# Altium PCB obc-comm.PcbDoc (part 2 of 2)
Units mm, origin at the board's own origin, x right, y up, seen from the top; angles counter-clockwise.
Board outline 60.02 x 35 mm, 4 copper layers (Top Layer, GND, VCC, Bottom Layer), stack 1.11 mm thick; 70 components, 62 nets, 294 pads, 175 vias.
Unrouted connection lines stored in the file: 79.
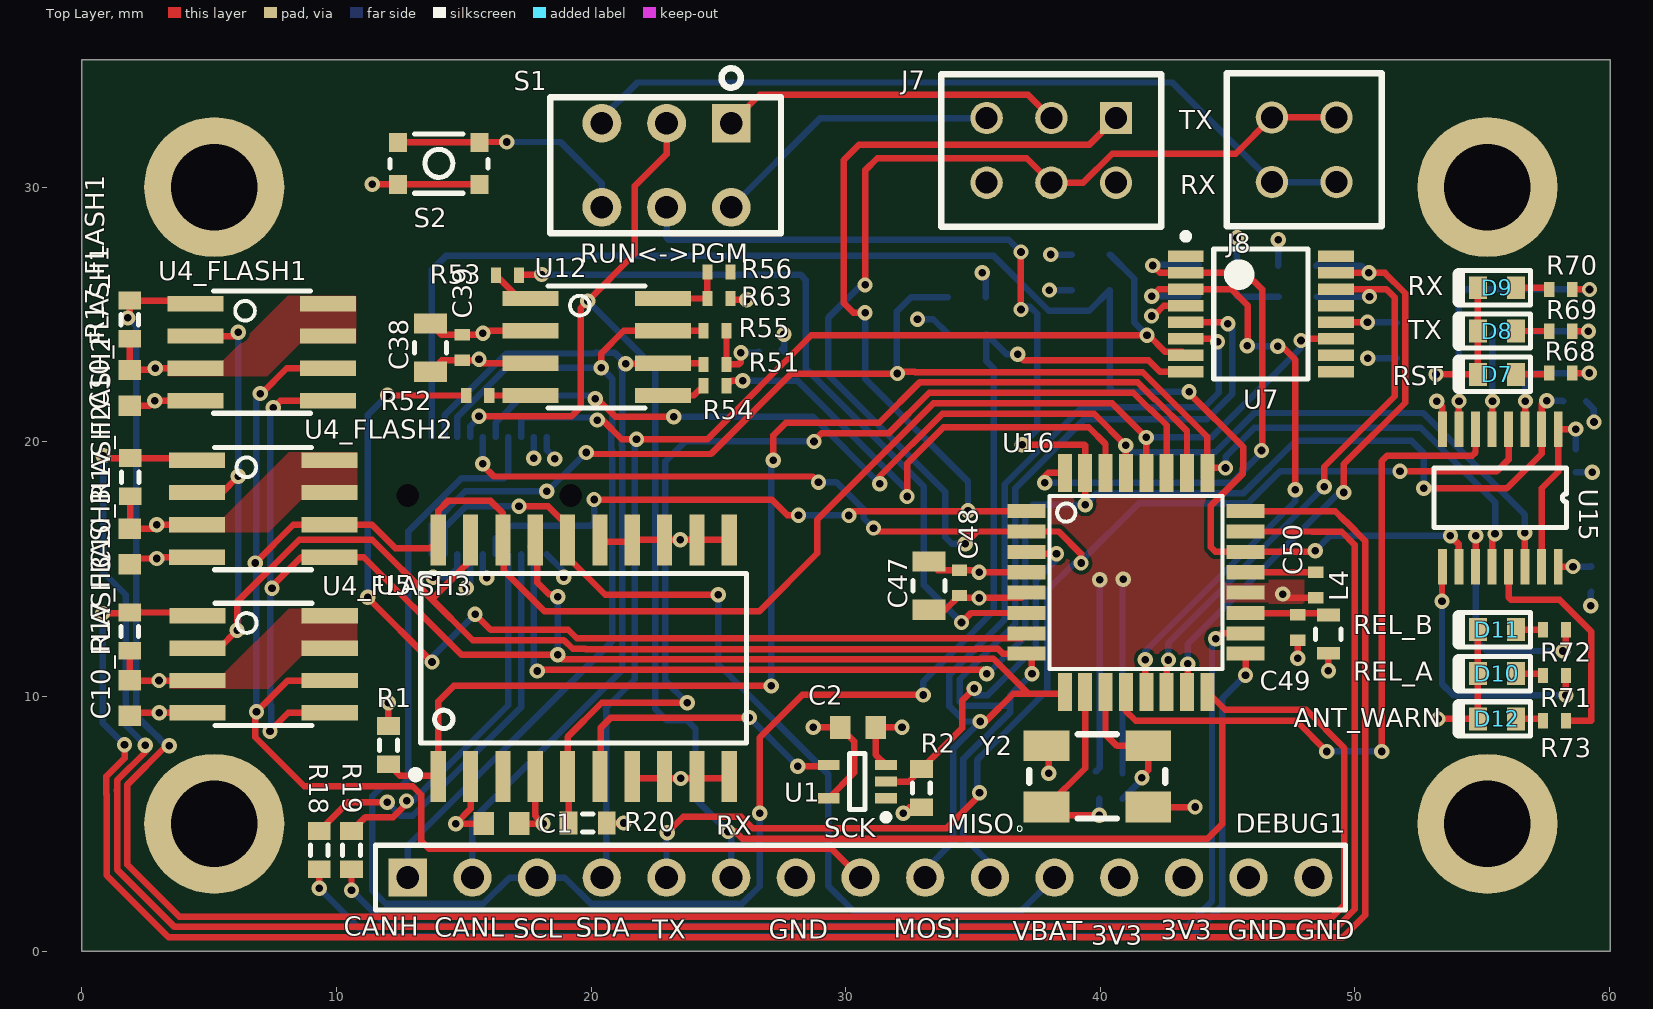
[diagram p0: Top Layer view]

## Via types
v1: diameter 0.6, hole 0.3, Top Layer to Bottom Layer, tented both sides, 165 vias
v2: diameter 0.6, hole 0.3, Top Layer to Bottom Layer, 10 vias

## Nets (pads, with @x,y where several pads share a name; then routed paths per layer and width w, separated by ;. In a path a pad name is that pad's centre, name@x,y a point inside that pad or via, vN(x,y) a via of type N, cw(c..) or ccw(c..) an arc to the next point about the centre after c; other vN are vias at no path point) (continued)
OUT4: (continued)
  Top Layer w0.254: v1(53.416,13.741) 53.416,15.084 U15.9 U15.9@53.467,15.065 ; v1(58.286,10.051) R71.2
  Bottom Layer w0.254: v1(53.416,13.741) 53.416,10.49 53.855,10.051 v1(58.286,10.051)
OUT5: R72.2 U15.11 | length 9.8
  Top Layer w0.254: U15.11 54.737,15.105 v1(54.737,16.307) ; v1(58.166,11.786) 58.286,11.906 R72.2
  Bottom Layer w0.254: v1(54.737,16.307) 54.737,12.228 55.179,11.786 v1(58.166,11.786)
OUT6: R73.2 U15.13 | length 9.5
  Top Layer w0.254: U15.13 56.032,13.894 56.134,13.792 58.039,13.792 59.284,12.548 59.284,9.042 R73.2
PAY: R19.2 U16.18 | length 47.2
  Top Layer w0.254: v1(10.59,2.386) R19.2 ; v1(44.526,12.268) 44.736,12.478 U16.18
  Bottom Layer w0.254: v1(10.59,2.386) 11.986,0.991 43.418,0.991 44.384,1.957 44.384,12.126 v1(44.526,12.268)
RESETn: R6.1 U7.3 U16.13 | length 25.4
  Top Layer w0.254: v1(41.763,11.442) 41.763,10.217 U16.13 ; v1(42.014,25.719) 42.289,25.994 U7.3 45.146,25.994 45.796,25.344 v1@45.796,23.774 ; v1(46.965,23.749) 47.133,23.749 47.65,23.231 v1(47.65,18.118)
  Bottom Layer w0.254: v1(41.763,11.442) 41.763,11.778 47.65,17.666 v1(47.65,18.118) ; v1(42.014,25.719) R6.1 ; v1(45.771,23.774) 45.72,23.774 45.695,23.749 v1(46.965,23.749)
RS: R56.1 R63.2 U12.8 | length 2.8
  Top Layer w0.254: U12.8 R63.2 R56.1
RS_IN: R56.2
RST_EPS: J1.6 R18.1 | length 16.4
  Top Layer w0.254: R18.1 10.451,5.842 v1(11.989,5.842)
  Bottom Layer w0.254: v1(11.989,5.842) 12.513,5.318 12.993,5.318 17.25,9.575 J1.6
RST_OBC: J1.4 R74.1 S1.5 U15.2 U16.31 | length 84.5
  Top Layer w0.254: v1(17.88,10.998) 17.931,11.049 35.382,11.049 v1(35.535,10.897) ; v1(36.881,27.457) 36.957,27.381 36.881,27.305 36.881,25.298 v1@36.982,25.197 ; v1(36.932,19.888) 39.377,19.888 39.402,19.863 U16.31 v1(39.402,17.533) ; v1(52.705,18.173) 55.968,18.173 57.332,19.537 U15.2 57.332,21.499 57.449,21.615 v1(57.531,21.615)
  Bottom Layer w0.254: J1.4 17.75,11.128 v1(17.88,10.998) ; S1.5 22.962,28.016 23.038,27.94 36.398,27.94 v1(36.881,27.457) ; v1(35.535,10.897) 35.56,10.871 37.059,12.37 37.059,17.247 37.345,17.533 v1(39.402,17.533) 39.857,17.988 45.623,17.988 47.676,20.041 52.222,20.041 52.705,19.558 v1(52.705,18.173) ; v1(36.932,19.888) 37.516,20.472 37.516,25.028 37.246,25.298 36.982,25.298 v1@36.982,25.197 ; v1(57.531,21.615) 58.148,21.615 R74.1
  other v1: 36.881,25.197
RST_PAY: J1.8 R19.1 | length 14.2
  Top Layer w0.254: R19.1 11.14,5.262 12.229,5.262 12.753,5.786 v1(12.753,5.897)
  Bottom Layer w0.254: v1(12.753,5.897) 12.997,5.897 16.75,9.65 J1.8
RST_PROG: J7.5 S1.4 | length 11.5
  Bottom Layer w0.254: S1.4 29.007,32.715 J7.5
RST_SW: S1.6 S2.1 | length 10
  Top Layer w0.254: S2.1@12.421,31.762 15.621,31.762 15.634,31.775 v1(16.688,31.775) ; S1.6@20.179,29.453 S1.6
  Bottom Layer w0.254: v1(16.688,31.775) 18.796,31.775 20.422,30.15 S1.6
RSTn_IN: U1.4 U5.6 | length 11.9
  Top Layer w0.254: U5.6@20.371,6.782 20.371,8.763 20.777,9.169 v1(26.213,9.169) ; v1(28.118,7.264) 29.289,7.264 U1.4
  Bottom Layer w0.254: v1(26.213,9.169) v1(28.118,7.264)
RTC_INTRPT: R20.1 U5.5 U16.27 | length 41.7
  Top Layer w0.254: R20.1 19.113,6.814 U5.5 19.075,8.407 20.422,9.754 v2(23.774,9.754) ; v1(28.753,20.015) 28.753,20.041 29.058,20.345 31.702,20.345 33.282,21.925 41.294,21.925 41.955,21.265 41.991,21.265 42.602,20.653 U16.27
  Bottom Layer w0.254: v2(23.774,9.754) 22.919,10.609 22.919,19.24 23.694,20.015 v1(28.753,20.015)
RTC_RSTn: R2.1 U1.2 U16.3 | length 14.5
  Top Layer w0.254: U1.2 32.473,6.655 R2.1 34.569,8.751 34.569,9.83 v1(35.052,10.312) v1@34.849,10.312 ; U16.3 37.175,15.605 v1(38.278,15.605)
  Bottom Layer w0.254: v1(35.052,10.312) 35.052,10.109 35.108,10.054 35.581,10.054 37.465,11.938 37.465,14.554 38.278,15.367 v1(38.278,15.605)
RX_SW: J8.1 J8.3 S1.3 | length 31.6
  Top Layer w0.254: S1.3 S1.3@20.422,32.856
  Bottom Layer w0.254: S1.3 20.422,32.715 21.819,34.112 42.824,34.112 J8.3 J8.1
RXCAN: R52.2 U16.7 | length 39.7
  Top Layer w0.254: v1(11.227,13.894) 11.227,13.877 v1(13.75,11.354) ; v1(12.001,21.832) 12.014,21.819 R52.2 ; v1(15.443,13.233) 16.053,12.624 19.098,12.624 19.432,12.289 36.913,12.289 U16.7
  Bottom Layer w0.254: v1(11.227,13.894) 11.227,21.057 v1(12.001,21.832) ; v1(13.75,11.354) 13.75,11.54 v1(15.443,13.233)
RXD_R: R52.1 U12.4 | length 1.6
  Top Layer w0.254: R52.1 U12.4
SCK: DEBUG1.8 U4_FLASH1.6 U4_FLASH2.6 U4_FLASH3.6 U5.18 U5.20 U7.11 U16.28 | length 104.4
  Top Layer w0.254: v1(6.807,15.24) 8.306,16.739 U4_FLASH2.6 11.395,16.739 12.316,15.818 13.662,15.818 U5.20 13.995,17.297 14.376,17.678 16.053,17.678 16.535,17.196 U5.18 16.561,16.126 16.561,14.956 18.177,13.34 26.599,13.34 28.88,15.621 28.88,16.948 33.44,21.509 38.125,21.509 38.134,21.519 40.457,21.519 v1(41.802,20.174) U16.28 ; v1(7.01,21.895) 7.061,21.895 8.052,22.885 U4_FLASH1.6 ; U4_FLASH3.6 8.085,10.625 v1(6.858,9.398) 6.812,9.352 6.812,8.396 8.731,6.477 12.993,6.477 13.332,6.137 13.332,4.321 13.64,4.013 29.452,4.013 DEBUG1.8 ; U5.20@14.021,15.459 14.021,16.602 U5.20@14.137,16.718 ; v1(47.879,23.978) 47.945,24.044 U7.11
  Bottom Layer w0.254: v1@6.731,15.24 v1(6.807,15.24) ; v1(6.858,9.398) 6.858,21.742 v1(7.01,21.895) ; v1(41.802,20.174) 44.355,20.174 47.879,23.698 v1(47.879,23.978)
SCK_A: J7.3 S1.1 | length 13.4
  Top Layer w0.254: S1.1 26.619,33.63 37.16,33.63 J7.3
SCK_A/RX: DEBUG1.6 J1.13 S1.2 U15.6 U16.12 | length 94.5
  Top Layer w0.254: v1(15.596,21.006) 19.228,21.006 19.588,21.366 19.588,25.252 v2(19.863,25.527) 21.718,27.382 21.718,30.048 22.962,31.292 S1.2 ; v1(25.375,4.699) 25.654,4.699 25.933,4.42 44.221,4.42 44.78,4.978 44.78,9.042 ; U16.12@40.996,10.197 41.002,10.191 40.996,10.184 U16.12 41.002,9.43 41.389,9.042 44.78,9.042 ; v1(48.895,7.841) 47.694,9.042 44.78,9.042 ; v1(51.046,7.841) 51.046,19.246 51.257,19.456 54.605,19.456 54.732,19.583 U15.6
  Bottom Layer w0.254: J1.13 15.25,20.609 15.596,20.955 v1(15.596,21.006) ; v2(19.863,25.527) 22.512,22.878 22.512,20.446 22.512,9.52 22.965,9.068 23.765,9.068 24.1,8.733 24.1,5.974 v1(25.375,4.699) 25.5,4.574 DEBUG1.6 ; v1(48.895,7.841) v1(51.046,7.841)
SPI_CSn: R5.1 U7.2 U16.32 | length 23.2
  Top Layer w0.254: v1(37.821,18.39) 37.821,18.644 37.955,18.778 U16.32 ; v1(42.062,26.924) 42.342,26.644 U7.2 45.695,26.644 46.35,25.989 46.35,19.68 v1(46.33,19.66)
  Bottom Layer w0.254: v1(37.821,18.39) 37.825,18.394 45.156,18.394 46.33,19.568 v1(46.33,19.66) ; v1(42.062,26.924) 42.088,26.949 R5.1 R5.1@43.738,26.822
TXCAN: R53.2 U16.6 | length 30.2
  Top Layer w0.254: R53.2@17.163,26.637 R53.2 17.189,26.568 v1(18.059,26.568) ; v1(34.544,12.903) 34.919,13.278 U16.6
  Bottom Layer w0.254: v1(18.059,26.568) 28.219,26.568 28.423,26.365 28.423,22.885 33.071,18.237 33.071,14.376 v1(34.544,12.903)
TXD_R: R53.1 U12.1 | length 1.7
  Top Layer w0.254: R53.1 17.177,25.629 U12.1
WAKEUPn: R24.2 U7.15 U16.15 | length 24.6
  Top Layer w0.254: U16.15 43.434,10.21 v1(43.434,11.278) ; U7.15 v1(50.546,26.645) 51.181,26.645 51.181,26.624 51.968,25.836 51.968,21.539 49.555,19.126 v1(49.555,18.009)
  Bottom Layer w0.254: v1(43.434,11.278) 43.434,12.058 49.384,18.009 v1(49.555,18.009) ; R24.2@48.538,26.975 R24.2 50.232,26.924 50.512,26.645 v1(50.546,26.645)
XTAL1: C51.2 U16.10 Y2.1 | length 8
  Top Layer w0.254: U16.10 39.402,7.182 Y2.1 38.197,5.339 v1(39.954,5.339)
  Bottom Layer w0.254: v1(39.954,5.339) C51.2
XTAL2: C52.2 U16.11 Y2.3 | length 6.1
  Top Layer w0.254: U16.11@40.157,10.223 U16.11 40.202,8.51 40.654,8.058 Y2.3 41.878,7.105 41.631,6.858 v1(41.631,6.807)
  Bottom Layer w0.254: C52.2 41.631,6.739 v1(41.631,6.807)
pads on no net: J1. U1.1 U5.3 U7.1 U7.9 U7.10 U7.13 U7.16

## Polygon pours and split planes (outlines as drawn)
GND on Top Layer "64M1_GND" (solid, pour order 24): 44.831,17.831 44.831,15.144 44.8,15.113 44.85,15.062 48.006,15.062 48.006,13.589 47.948,13.647 44.858,13.647 44.858,11.066 44.815,11.024 37.973,11.024 37.973,17.831
+3V3 on Top Layer "+3V3_L01_P012" (solid, pour order 12): 10.744,25.73 8.077,25.73 5.512,23.165 3.378,23.165 3.378,22.581 7.29,22.581 8.585,23.876 10.77,23.876 10.77,25.705
+3V3 on Top Layer "+3V3_L01_P016" (solid, pour order 16): 10.795,13.453 8.128,13.453 5.563,10.888 3.429,10.888 3.429,10.304 7.341,10.304 8.636,11.599 10.82,11.599 10.82,13.428
+3V3 on Top Layer "+3V3_L01_P014" (solid, pour order 14): 10.795,19.59 8.128,19.59 5.563,17.025 3.429,17.025 3.429,16.44 7.341,16.44 8.636,17.736 10.82,17.736 10.82,19.565
GND on GND "GND_L02_P026" (solid, remove dead copper, pour order 26): 0,0 60.046,0 60.046,34.9 60.122,34.976 0,34.976
+3V3 on VCC "+3V3_L03_P028" (solid, remove dead copper, pour order 28): 0,0 60.046,0 59.995,0.051 59.995,34.976 0.127,34.976 0,35.103

## Silkscreen, mask and mechanical layers (free items; w line width, h text height)
Top Overlay:
  text "TX" at 43.103,32.271 h0.75
  text "RX" at 43.129,29.718 h0.75
  text "RUN<->PGM" at 19.572,27.036 h0.75
  text "RX" at 52.07,25.756 h0.75
  text "TX" at 52.095,24.028 h0.75
  text "RST" at 51.486,22.225 h0.75
  text "REL_B" at 49.936,12.446 h0.75
  text "REL_A" at 49.936,10.617 h0.75
  text "ANT_WARN" at 47.6,8.788 h0.75
  text "MISO" at 33.985,4.623 h0.75
  text "RX" at 24.917,4.572 h0.75
  text "SCK" at 29.159,4.47 h0.75
  text "CANH" at 10.287,0.61 h0.75
  text "CANL" at 13.843,0.559 h0.75
  text "SDA" at 19.406,0.559 h0.75
  text "SCL" at 16.942,0.533 h0.75
  text "MOSI" at 31.877,0.533 h0.75
  text "TX" at 22.403,0.483 h0.75
  text "GND" at 26.975,0.483 h0.75
  text "3V3" at 42.367,0.458 h0.75
  text "GND" at 45.009,0.458 h0.75
  text "GND" at 47.65,0.458 h0.75
  text "VBAT" at 36.551,0.432 h0.75
  text "3V3" at 39.649,0.254 h0.75
Bottom Overlay:
  text "HERON MK II" at 43.409,15.011 h0.75
  text "OBC V2" at 43.383,13.343 h0.75
Route Tool Path:
  lines w0.254: 0,0 60,0 60,35 0,35 0,0